# EAGLE board tetris_big_noregulator_PCBUSB (EAGLE 6.2)

Size 100 x 50 mm. Coordinates in mm from the lower left corner, seen from the top.
Outline: 0,40 0,2.54 arc90 2.54,0 97.46,0 arc90 100,2.54 100,47.46 arc90 97.46,50 10,50 arc90 0,40
Copper layers (1*16): Top 0.035mm / dielectric 1.5mm / Bottom 0.035mm
Design rules: minimum track width 10mil, minimum drill 24mil, track to track 8mil, track to pad 8mil, pad to pad 8mil, via to via 8mil, smd to smd 8mil, copper to edge 40mil, drill to drill 8mil, minimum pad ring 10mil, minimum via ring 8mil, stop-mask expansion 4mil, vias tented up to drill 0mil, thermal gap 10mil
Holes 2 mm at 90,25 90,22 90,28 87,25 93,25 94,29 94,21 86,21 86,29
Holes 1 mm at 95,23 95,27 85,27 85,23 92,20 88,20 92,30 88,30 92,23 88,23 92,27 88,27 95,25 85,25 90,20 90,30
Milling: 4 lines

## Footprints (pad centres in the part's own frame; a part is rotated, then mirrored left to right if it is on the bottom)
CPOL-RADIAL-100UF-25V = drill 0.7 pad 1.651 square: 1 1.27,0 | drill 0.7 pad 1.651: 2 -1.27,0
C025-025X050 = drill 0.813 octagon: 1 -1.27,0; 2 1.27,0
DO41-10 = drill 1.118 pad 1.93: A 5.08,0; C -5.08,0
TQFP32-08 = smd 1.27 x 0.559: 1 -4.293,2.8; 2 -4.293,2; 3 -4.293,1.2; 4 -4.293,0.4; 5 -4.293,-0.4; 6 -4.293,-1.2; 7 -4.293,-2; 8 -4.293,-2.8; 17 4.293,-2.8; 18 4.293,-2; 19 4.293,-1.2; 20 4.293,-0.4; 21 4.293,0.4; 22 4.293,1.2; 23 4.293,2; 24 4.293,2.8 | smd 0.559 x 1.27: 9 -2.8,-4.293; 10 -2,-4.293; 11 -1.2,-4.293; 12 -0.4,-4.293; 13 0.4,-4.293; 14 1.2,-4.293; 15 2,-4.293; 16 2.8,-4.293; 25 2.8,4.293; 26 2,4.293; 27 1.2,4.293; 28 0.4,4.293; 29 -0.4,4.293; 30 -1.2,4.293; 31 -2,4.293; 32 -2.8,4.293
1X16_LOCK = drill 1.016 pad 1.88: 1 0,0.127; 2 2.54,-0.127; 3 5.08,0.127; 4 7.62,-0.127; 5 10.16,0.127; 6 12.7,-0.127; 7 15.24,0.127; 8 17.78,-0.127; 9 20.32,0.127; 10 22.86,-0.127; 11 25.4,0.127; 12 27.94,-0.127; 13 30.48,0.127; 14 33.02,-0.127; 15 35.56,0.127; 16 38.1,-0.127
1X05_LOCK = drill 1.016 pad 1.88: 1 0,0.127; 2 2.54,-0.127; 3 5.08,0.127; 4 7.62,-0.127; 5 10.16,0.127
1X01 = drill 1.016 pad 1.88: 1 0,0
AXIAL-0.3 = drill 0.9 pad 1.88: P$1 -3.81,0; P$2 3.81,0
TACTILE-PTH = drill 1.016 pad 1.88: 1 -3.251,2.261; 2 3.251,2.261; 3 -3.251,-2.261; 4 3.251,-2.261
LD-1088BS = drill 0.8 pad 1.778: A1 8.89,12; A2 1.27,12; A3 -3.81,12; A4 8.89,-12; A5 6.35,-12; A6 1.27,-12; A7 -6.35,-12; A8 -8.89,-12; C1 6.35,12; C2 3.81,12; C3 -1.27,12; C4 -6.35,12; C5 -8.89,12; C6 3.81,-12; C7 -1.27,-12; C8 -3.81,-12
ISK4.1K_I-80450RF_I2G = drill 0.5 pad 1.93 square: P$1 -7.303,0; P$2 7.303,0
NICHICON_10X30 = drill 1.2 pad 2.54 octagon: P$1 3.23,-1.75 | drill 1.2 pad 2.54: P$2 8.77,-1.75
PIEZO_ROUND_ENCASED_PTH = drill 1.3: P$1 10,2; P$2 10,-2
R-7 = drill 0.6 pad 1.27: P$1 -3.25,0; P$2 3.25,0
SWITCH_BIG = drill 2.2 octagon: P$1 -4.5,0; P$2 0,0; P$3 4.5,0
D-7.5 = drill 0.813: A 2.81,0; C -3,0
USB-MINIB = smd 2.5 x 0.5: D+ 2.5,0; D- 2.5,0.8; GND 2.5,-1.6; ID 2.5,-0.8; VBUS 2.5,1.6 | smd 2.5 x 2: MTN1 -3,4.5; MTN2 2.5,4.5; MTN3 -3,-4.5; MTN4 2.5,-4.5 | hole 0.9: 0,2.2; 0,-2.2
USB-A-PCB = smd 7.5 x 1.5: 5V -0.2,-3.5; GND -0.2,3.5 | smd 6.5 x 1: USB_M 0.3,-1; USB_P 0.3,1

## Placement (x,y rotation side)
C1  [CPOL-RADIAL-100UF-25V]  58.69,4.98 0 top
C2  [C025-025X050]  1.27,-38.1 0 top  (outside the outline)
D5  1N4004  [DO41-10]  22.42,56.94 90 top
IC1  MEGA8-AI  [TQFP32-08]  50,25 225 top
JP1  M16LOCK  [1X16_LOCK]  25.4,45.72 0 top
JP2  [1X05_LOCK]  66.04,45.72 0 top
JP3  M01PTH  [1X01]  78.74,45.72 0 top
R2  [AXIAL-0.3]  78.23,55.94 90 top
S1  [TACTILE-PTH]  5,4 180 top
S2  [TACTILE-PTH]  95,36 270 top
S5  [TACTILE-PTH]  86,45 90 top
S6  [TACTILE-PTH]  14,4 0 top
S8  [TACTILE-PTH]  95,45 90 top
S9  [TACTILE-PTH]  86,4 0 top
S10  [TACTILE-PTH]  95,4 0 top
U$1  LD-1088BS  [LD-1088BS]  34,25 0 top
U$2  LD-1088BS  [LD-1088BS]  66,25 0 top
U$3  LOGO  [LOGO]  1.27,-5.08 0 top  (outside the outline)
U$4  I-80450RF  [ISK4.1K_I-80450RF_I2G]  90,25 270 top
U$5  NICHICON_12F  [NICHICON_10X30]  16.43,41.21 180 top
U$6  LOGO  [LOGO]  1.27,-11.43 0 top  (outside the outline)
U$7  PIEZO_ROUND_PTH  [PIEZO_ROUND_ENCASED_PTH]  90,25 0 bottom
U$8  R-7  [R-7]  3.81,-17.78 0 top  (outside the outline)
U$9  SPST_BIG_PTH  [SWITCH_BIG]  5.08,-22.86 0 top  (outside the outline)
U$10  D-6  [D-7.5]  2.54,-27.94 0 top  (outside the outline)
U$11  D-6  [D-7.5]  2.54,-30.48 0 top  (outside the outline)
U$12  D-6  [D-7.5]  2.54,-33.02 0 top  (outside the outline)
X1  USB-MINIB-5PIN  [USB-MINIB]  50.47,5.08 90 bottom
X2  USBPCB  [USB-A-PCB]  7.62,43.18 315 top

## Library data of the parts
C1 R2 X1 X2 = SparkFun
C2 = rcl
D5 = adafruit
IC1 = atmel; MPN: ATMEGA8-16AU; OC_FARNELL: 9171371; OC_NEWARK: 73M8863
JP1-JP3 = SparkFun-Connectors
S1 S2 S5 S6 S8-S10 = SparkFun-Electromechanical
U$1 U$2 U$4 U$5 U$7-U$12 = mrule
U$3 U$6 = mrule2

## Nets
GND: C2.1 IC1.3 IC1.5 IC1.21 S1.3 S1.4 S2.3 S2.4 S5.1 S5.2 S6.1 S6.2 S8.3 S8.4 S9.3 S9.4 S10.3 S10.4 U$4.P$2 U$5.P$1 U$7.P$2 X1.GND X1.MTN1 X1.MTN2 X1.MTN3 X1.MTN4 X2.GND
N$1: IC1.32 JP1.15 U$1.A4 U$2.C1
N$2: IC1.31 JP1.14 U$1.A5 U$2.C2
N$3: IC1.30 JP1.13 U$1.C6 U$2.A2
N$4: IC1.26 JP1.12 U$1.A6 U$2.C3
N$5: IC1.7 JP1.11 U$1.C7 U$2.A3
N$6: IC1.24 JP1.10 U$1.A7 U$2.C4
N$7: IC1.23 JP1.9 U$1.A8 U$2.C5
N$8: IC1.25 JP1.16 U$1.C8 U$2.A1
N$9: U$10.A X1.VBUS X2.5V
N$10: IC1.13 JP1.6 U$1.C2 U$2.A5
N$11: IC1.12 JP1.5 U$1.A2 U$2.C6
N$12: IC1.11 JP1.4 U$1.C3 U$2.A6
N$13: IC1.10 JP1.3 U$1.A3 U$2.C7
N$14: IC1.9 JP1.8 U$1.A1 U$2.C8
N$15: IC1.2 JP1.2 U$1.C4 U$2.A7
N$16: IC1.1 JP1.1 U$1.C5 U$2.A8
N$17: C1.2 IC1.8 JP3.1 U$4.P$1 U$7.P$1
N$18: U$10.C U$11.A
N$19: U$11.C U$12.A
N$20: IC1.27 JP2.5 S10.1 S10.2
N$21: IC1.28 JP2.4 S9.1 S9.2
N$22: IC1.15 JP2.3 S2.1 S2.2
N$23: IC1.16 JP2.2 S1.1 S1.2 S8.1 S8.2
N$24: D5.C U$8.P$2 U$9.P$2 U$12.C
N$25: D5.A U$5.P$2 U$8.P$1
N$26: IC1.17 JP2.1 S5.3 S5.4 S6.3 S6.4
N$28: IC1.14 JP1.7 U$1.C1 U$2.A4
N$29: IC1.29 R2.P$1
VCC: C1.1 C2.2 IC1.4 IC1.6 IC1.18 IC1.20 R2.P$2 U$9.P$1

## Tracks (layer width: path | path; a pad name or v marks a point on that pad's centre or on a via)
GND  (26 unrouted)
N$1  (3 unrouted)
N$2  (3 unrouted)
N$3  (3 unrouted)
N$4  (3 unrouted)
N$5  (3 unrouted)
N$6  (3 unrouted)
N$7  (3 unrouted)
N$8  (3 unrouted)
N$9  (2 unrouted)
N$10  (3 unrouted)
N$11  (3 unrouted)
N$12  (3 unrouted)
N$13  (3 unrouted)
N$14  (3 unrouted)
N$15  (3 unrouted)
N$16  (3 unrouted)
N$17  (4 unrouted)
N$18  (1 unrouted)
N$19  (1 unrouted)
N$20  (3 unrouted)
N$21  (3 unrouted)
N$22  (3 unrouted)
N$23  (5 unrouted)
N$24  (3 unrouted)
N$25  (2 unrouted)
N$26  (5 unrouted)
N$28  (3 unrouted)
N$29  (1 unrouted)
VCC  (7 unrouted)